# EAGLE board Adafruit USB C microlipo charger (EAGLE 9.5.0)
REV: A
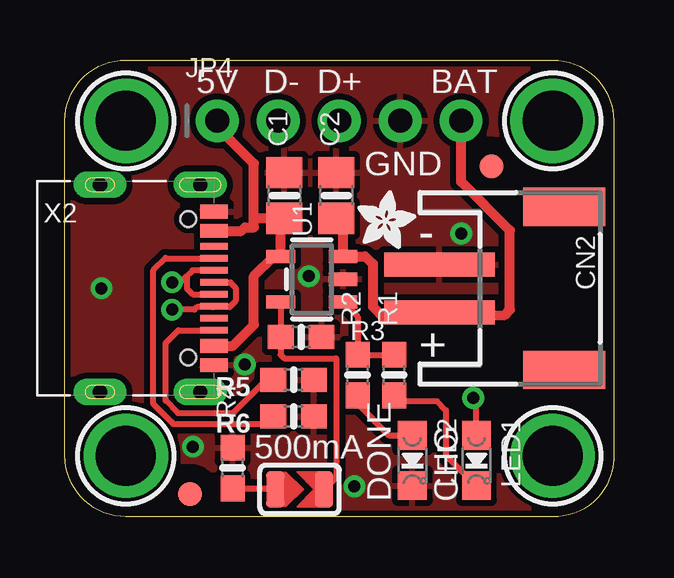
[diagram p0: board, top side]
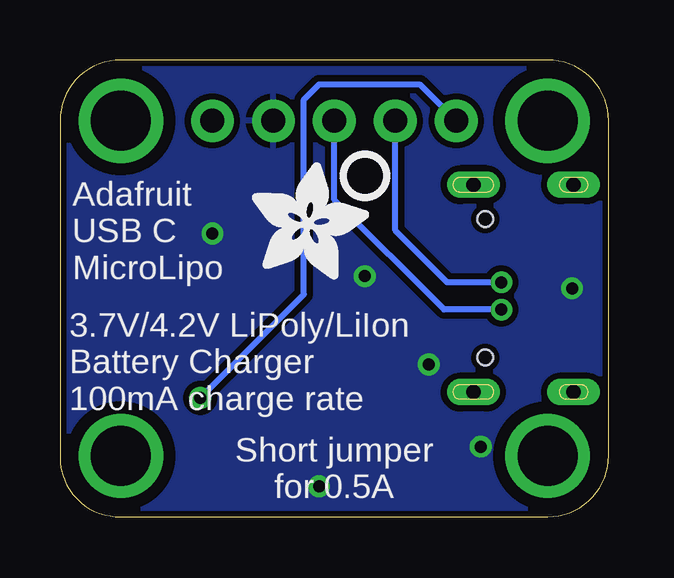
[diagram p1: board, bottom side, seen from below]

Size 22.86 x 19.05 mm. Coordinates in mm from the lower left corner, seen from the top.
Outline: 2.54,19.05 20.32,19.05 arc-90 22.86,16.51 22.86,2.41 arc-90 20.32,0 2.54,0 arc-90 0,2.54 0,16.51 arc-90 2.54,19.05
Copper layers (1*16): Top 0.035mm / dielectric 1.5mm / Bottom 0.035mm
Design rules "adafruit": minimum track width 8mil, minimum drill 15.5mil, track to track 8mil, track to pad 8mil, pad to pad 8mil, via to via 8mil, smd to smd 8mil, copper to edge 10mil, drill to drill 8mil, minimum pad ring 10mil, minimum via ring 8mil, stop-mask expansion 2mil, vias tented up to drill 20mil, thermal gap 10mil

## Footprints (pad centres in the part's own frame; a part is rotated, then mirrored left to right if it is on the bottom)
0805-NO@1 = smd 1.3 x 1.5: 1 -0.95,0; 2 0.95,0
JSTPH2 = smd 1 x 4.6: 1 -1,-3.7; 2 1,-3.7 | smd 1.6 x 3.4: NC1 -3.4,1.5; NC2 3.4,1.5
FIDUCIAL_1MM = smd 1 x 1: 1 0,0
1X05_ROUND_70 = drill 1 pad 1.778: 1 -5.08,0; 2 -2.54,0; 3 0,0; 4 2.54,0; 5 5.08,0
CHIPLED_0805_NOOUTLINE = smd 1.2 x 1.2: A 0,-1.05; C 0,1.05
0603-NO = smd 1.075 x 1: 1 -0.85,0; 2 0.85,0
SOLDERJUMPER_ARROW_NOPASTE = smd 0.762 x 1.524: 1 -1.016,0; 2 1.016,0
SOT23-5 = smd 0.55 x 1.2: 1 -0.95,-1.3; 2 0,-1.3; 3 0.95,-1.3; 4 0.95,1.3; 5 -0.95,1.3
MOUNTINGHOLE_2.5_PLATED = drill 2.5 pad 3.2: P$1 0,0
USB_C_CUSB31-CFM2AX-01-X = smd 0.575 x 1.15: A1B12 -3.2,7.355; A4B9 -2.4,7.355; B1A12 3.2,7.355; B4A9 2.4,7.355 | smd 0.275 x 1.15: A5 -1.25,7.355; A6 -0.25,7.355; A7 0.25,7.355; A8 1.25,7.355; B5 1.75,7.355; B6 0.75,7.355; B7 -0.75,7.355; B8 -1.75,7.355 | drill 0.6 pad 1 long: M1 -4.32,6.78; M2 4.32,6.78; M3 -4.32,2.6; M4 4.32,2.6 | hole 0.65: 2.89,6.28; -2.89,6.28

## Placement (x,y rotation side)
C1  10µF  [0805-NO@1]  9.14,13.4 90 top
C2  10µF  [0805-NO@1]  11.3,13.4 90 top
CN2  JSTPH  [JSTPH2]  19.3,9.53 270 top
FID1  FIDUCIAL""  [FIDUCIAL_1MM]  5.21,0.95 0 top
FID2  FIDUCIAL""  [FIDUCIAL_1MM]  17.78,14.61 0 top
JP4  [1X05_ROUND_70]  11.43,16.51 0 top
LED1  RED  [CHIPLED_0805_NOOUTLINE]  17.14,2.35 180 top
LED2  GREEN  [CHIPLED_0805_NOOUTLINE]  14.48,2.35 180 top
R1  470  [0603-NO]  13.72,5.91 90 top
R2  470  [0603-NO]  12.19,5.91 90 top
R3  10K\  [0603-NO]  9.84,7.49 0 top
R4  2.2K  [0603-NO]  6.99,2.03 90 top
R5  5.1K  [0603-NO]  9.53,5.71 180 top
R6  5.1K  [0603-NO]  9.53,4.19 180 top
SJ1  [SOLDERJUMPER_ARROW_NOPASTE]  9.78,1.14 0 top
U1  MCP73831T-2ACI/OT  [SOT23-5]  10.29,9.91 90 top
U$2  [ADAFRUIT_2.5MM]  12.19,11.18 0 top
U$9  MOUNTINGHOLE2.5  [MOUNTINGHOLE_2.5_PLATED]  20.32,2.54 0 top
U$10  MOUNTINGHOLE2.5  [MOUNTINGHOLE_2.5_PLATED]  20.32,16.51 0 top
U$11  MOUNTINGHOLE2.5  [MOUNTINGHOLE_2.5_PLATED]  2.54,2.54 0 top
U$12  MOUNTINGHOLE2.5  [MOUNTINGHOLE_2.5_PLATED]  2.54,16.51 0 top
U$13  [ADAFRUIT_5MM]  14.86,9.91 0 bottom
U$16  [PCBFEAT-REV-040]  10.16,14.22 0 bottom
X2  [USB_C_CUSB31-CFM2AX-01-X]  -1.14,9.53 270 top

## Library data of the parts
C1 C2 CN2 JP4 LED1 LED2 R1-R3 R5 R6 U1 U$2 U$13 U$16 X2 = microbuilder
FID1 SJ1 U$9-U$12 = microbuilder; BOM: EXCLUDE
FID2 = microbuilder; AUTHOR: K. TOWNSEND; BOM: EXCLUDE
R4 = microbuilder; AUTHOR: K. TOWNSEND

## Nets
5V: C1.1 JP4.1 LED1.A U1.4 X2.A4B9 X2.B4A9
CC1: R6.2 X2.A5
CC2: R5.2 X2.B5
D+: JP4.3 X2.A6 X2.B6
D-: JP4.2 X2.A7 X2.B7
GND: C1.2 C2.2 CN2.1 JP4.4 LED2.C R3.2 R4.2 R5.1 R6.1 U1.2 X2.A1B12 X2.B1A12
N$1: LED1.C R1.1
N$2: R1.2 R2.2 U1.1
N$3: R4.1 SJ1.1
N$5: R3.1 SJ1.2 U1.5
N$6: LED2.A R2.1
VBAT: C2.1 CN2.2 JP4.5 U1.3

## Tracks (layer width: path | path; a pad name or v marks a point on that pad's centre or on a via)
5V  (via drill 0.5)
  Top 0.254: LED1.A 17.14,4.83 v17.02,4.95
  Top 0.406: X2.A4B9 7.36,11.93 7.5,12.07 7.87,12.07 7.87,12.45 | 7.87,12.45 C1.1 8.99,12.29 U1.4 8.7,10.86 7.87,10.03 7.87,8 7,7.12 X2.B4A9 | JP4.1 6.35,16.26 7.87,14.73 7.87,12.45
  Bottom 0.254: v17.02,4.95 12.7,9.27 12.7,17.4 12.06,18.03 7.87,18.03 JP4.1
CC1
  Top 0.254: R6.2 8.35,3.86 4.53,3.86 4.45,3.94 3.68,4.7 3.68,10.29 4.19,10.79 4.21,10.78 X2.A5
CC2
  Top 0.254: R5.2 8.38,5.71 6.99,4.32 4.72,4.32 4.19,4.85 4.19,7.24 4.73,7.78 X2.B5
D+  (via drill 0.5)
  Top 0.254: X2.A6 6.89,9.78 7.12,9.55 7.12,9 6.86,8.74 6.86,8.76 6.22,8.76 X2.B6 6.18,8.74 5.5,8.74 5.39,8.64 v4.47,8.64
  Bottom 0.254: v4.47,8.64 6.86,8.64 11.43,13.21 JP4.3
D-  (via drill 0.5)
  Top 0.254: X2.B7 5.32,10.28 5.08,10.03 | 5.08,10.03 5.08,9.53 5.33,9.27 5.34,9.28 X2.A7 | 5.08,10.03 4.83,9.78 v4.47,9.78
  Bottom 0.254: v4.47,9.78 6.73,9.78 8.89,11.94 JP4.2
GND  (via drill 0.5)
  other vias: 12.06,1.27 16.51,11.81 1.52,9.53 10.16,10.03 5.33,2.92 7.49,6.35
  pour Top (isolate 0.254): 0,0 0,19.05 22.86,19.05 22.86,0
  pour Bottom (isolate 0.254): 0,19.05 22.86,19.05 22.86,0 0,0
N$1
  Top 0.254: R1.1 13.95,4.83 15.49,4.83 15.88,4.45 15.88,2.57 LED1.C
N$2
  Top 0.254: U1.1 12.19,8.35 R2.2 R1.2
N$3
  Top 0.254: R4.1 9.18,1.18 9.14,1.14 SJ1.1
N$5
  Top 0.254: U1.5 R3.1 8.99,6.75 9.14,6.6 11.3,6.6 11.3,1.65 SJ1.2
N$6
  Top 0.254: R2.1 12.19,4.7 13.49,3.4 LED2.A
VBAT
  Top 0.406: C2.1 11.59,12.16 U1.3 12.51,10.86 12.83,10.54 12.83,8.76 13.34,8.26 15.46,8.26 CN2.2 18.3,8.4 18.54,8.64 18.54,11.94 16.51,13.97 JP4.5

## Text on the board
tPlace: 5V | D- | D+ | BAT | GND | - | + | 500mA | DONE | CHG
bPlace: Adafruit / USB C / MicroLipo | 3.7V/4.2V LiPoly/LiIon / Battery Charger / 100mA charge rate | Short jumper / for 0.5A